# EAGLE board ptn5 (EAGLE 5.06)
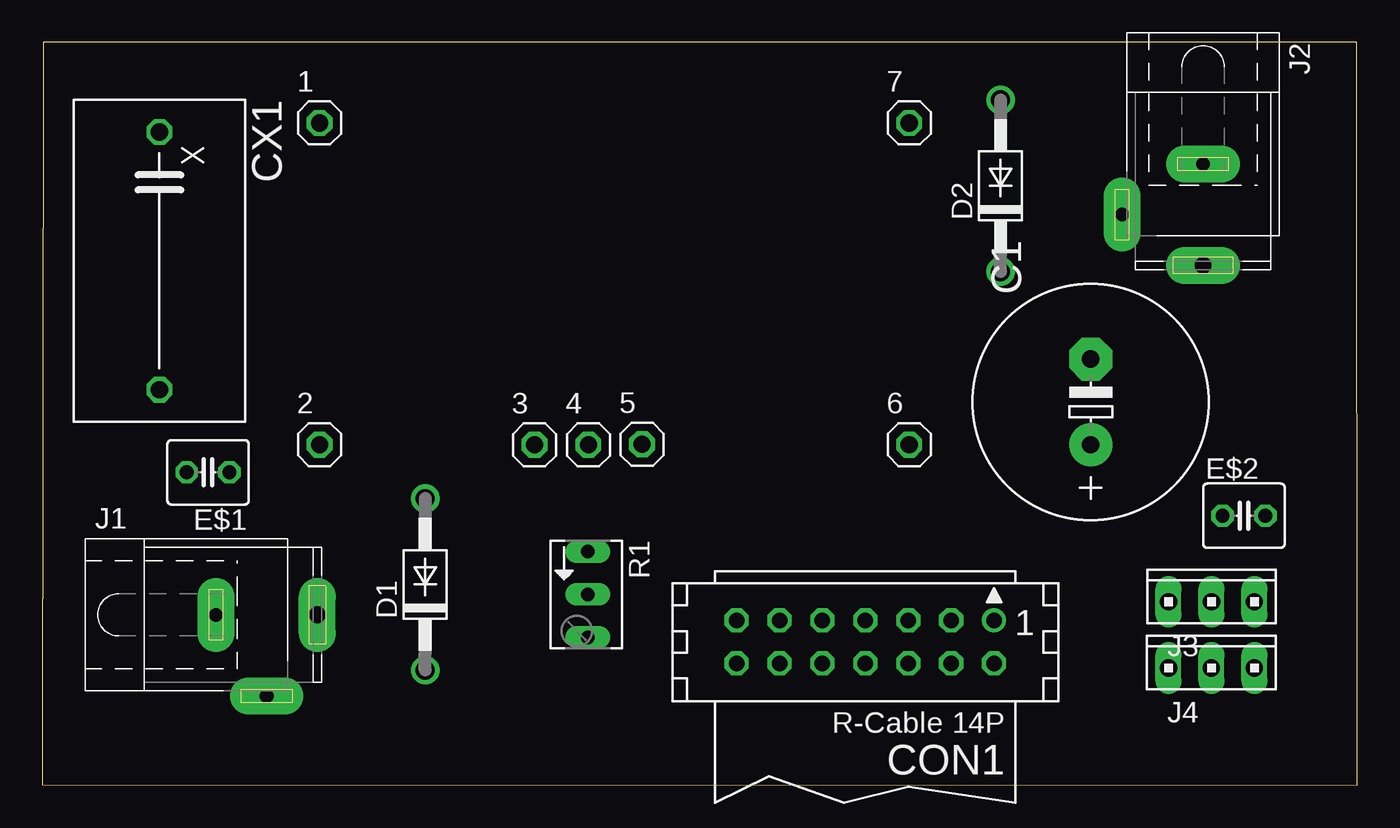
[diagram p0: board, top side]
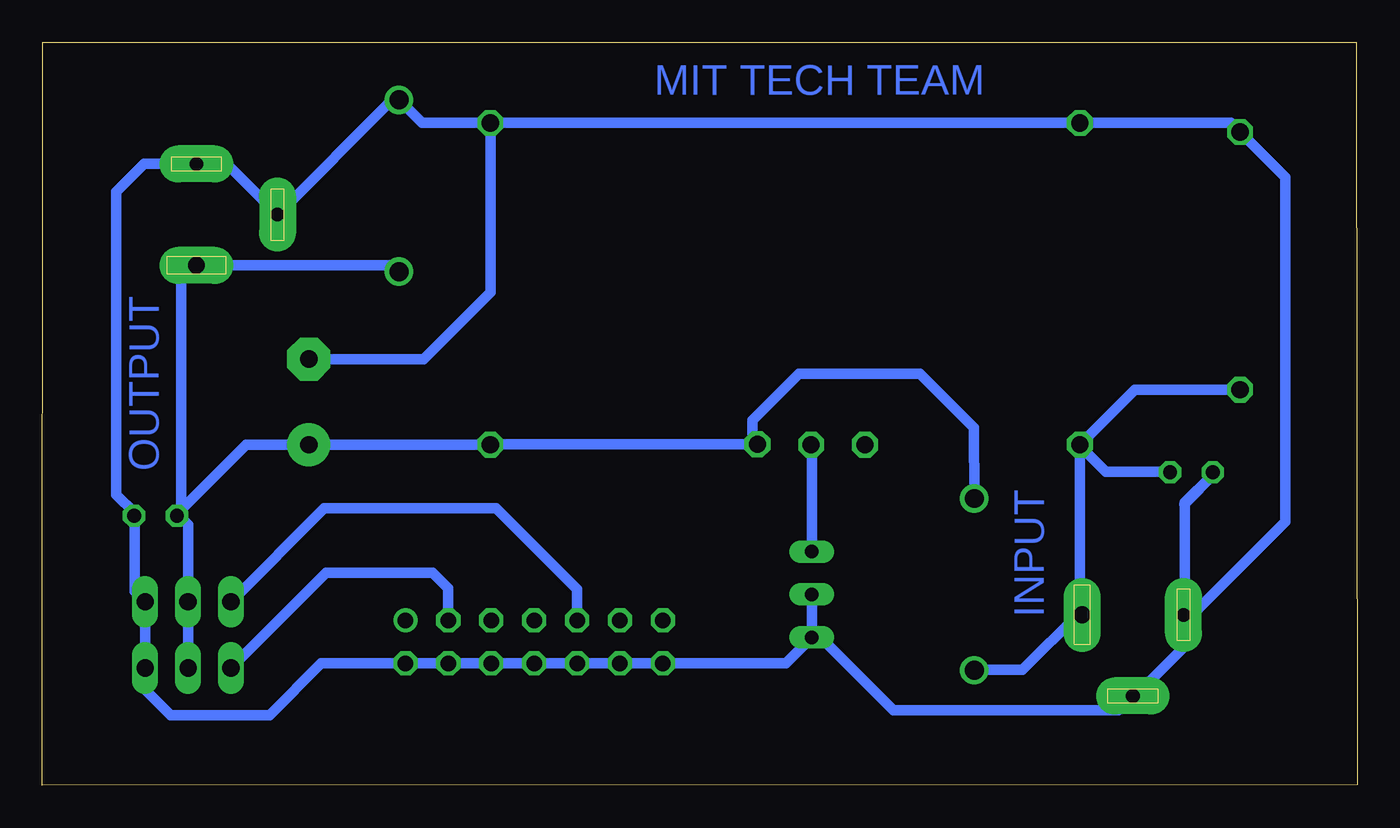
[diagram p1: board, bottom side, seen from below]

Size 77.82 x 43.96 mm. Coordinates in mm from the lower left corner, seen from the top.
Outline: 0,0.03 77.82,0 77.81,43.96 0.05,43.96 0,0.03
Copper layers (1*16): Top 0.035mm / dielectric 1.5mm / Bottom 0.035mm
Design rules "default": minimum track width 10mil, minimum drill 24mil, track to track 8mil, track to pad 8mil, pad to pad 8mil, via to via 8mil, smd to smd 8mil, copper to edge 40mil, drill to drill 8mil, minimum pad ring 10mil, minimum via ring 8mil, stop-mask expansion 4mil, vias tented up to drill 0mil, thermal gap 10mil

## Footprints (pad centres in the part's own frame; a part is rotated, then mirrored left to right if it is on the bottom)
1X01 = drill 1.016 octagon: 1 0,0
E5-13 = drill 1.016 pad 2.54 round: + -2.54,0 | drill 1.016 pad 2.54 octagon: - 2.54,0
CON14 = drill 0.914 round: 1 -7.62,-1.27 | drill 0.914 octagon: 2 -7.62,1.27; 3 -5.08,-1.27; 4 -5.08,1.27; 5 -2.54,-1.27; 6 -2.54,1.27; 7 0,-1.27; 8 0,1.27; 9 2.54,-1.27; 10 2.54,1.27; 11 5.08,-1.27; 12 5.08,1.27; 13 7.62,-1.27; 14 7.62,1.27
XC15B10 = drill 1.016 octagon: 1 -7.62,0; 2 7.62,0
DO41-10 = drill 1.118 round: A 5.08,0; C -5.08,0
C025-040X050 = drill 0.813 octagon: 1 -1.27,0; 2 1.27,0
SPC4078 = drill 0.8 pad 2.184 long: 1 -3,0; 2 0,-4.8 | drill 1 pad 2.184 long: 3 3,0
10X03MTA = drill 1.016 long: 1 2.54,0; 2 0,0; 3 -2.54,0
B64Y = drill 0.813 long: A 2.54,0; E -2.54,0; S 0,0

## Placement (x,y rotation side)
1  [1X01]  16.41,39.19 0 top
2  [1X01]  16.41,20.16 0 top
3  [1X01]  29.13,20.15 0 top
4  [1X01]  32.32,20.15 0 top
5  [1X01]  35.5,20.18 0 top
6  [1X01]  51.31,20.16 0 top
7  [1X01]  51.31,39.19 0 top
C1  [E5-13]  62.05,22.68 90 top
CON1  [CON14]  48.71,8.49 180 top
CX1  [XC15B10]  6.93,31.03 270 top
D1  1N4004  [DO41-10]  22.67,11.89 90 top
D2  1N4004  [DO41-10]  56.72,35.48 90 top
E$1  [C025-040X050]  9.81,18.52 180 top
E$2  [C025-040X050]  71.12,15.96 0 top
J1  [SPC4078]  13.28,10.09 0 top
J2  [SPC4078]  68.7,33.76 270 top
J3  [10X03MTA]  69.2,10.86 0 top
J4  [10X03MTA]  69.2,6.95 0 top
R1  [B64Y]  32.28,11.3 270 top

## Library data of the parts
1-7 = pinhead
C1 CX1 E$1 E$2 = rcl
CON1 = con-harting
D1 D2 = diode
J1 J2 = con-jack
J3 J4 = con-amp
R1 = pot

## Nets
N$1: 2.1 CX1.2 D1.C J1.3
N$2: CON1.3 J4.3
N$3: CON1.9 J3.3
N$5: 4.1 R1.E
N$7: 1.1 7.1 C1.- CON1.2 CON1.4 CON1.6 CON1.8 CON1.10 CON1.12 CON1.14 CX1.1 D2.A J1.1 J1.2 J2.1 J2.2 J3.1 J4.1 R1.A R1.S
N$8: 5.1 6.1 C1.+ D1.A D2.C J2.3 J3.2 J4.2

## Tracks (layer width: path | path; a pad name or v marks a point on that pad's centre or on a via)
N$1
  Bottom 0.61: CX1.2 13.16,23.41 2.1 16.41,10.22 | J1.3 16.41,10.22 | 16.41,10.22 16.42,10.22 19.81,6.83 22.65,6.83 D1.C
N$2
  Bottom 0.61: CON1.3 53.79,11.67 54.71,12.59 61.01,12.59 J4.3
N$3
  Bottom 0.61: CON1.9 46.17,11.61 50.96,16.39 61.13,16.39 J3.3
N$5
  Bottom 0.61: R1.E 32.28,20.11 4.1
N$7
  Bottom 0.61: 8.68,18.27 10.19,16.76 10.19,10.18 J1.1 | J1.1 9.77,10.09 4.26,15.6 4.26,35.98 CX1.1 7.47,39.19 1.1 | J1.1 10.19,10 10.19,8.24 13.15,5.29 J1.2 14.13,4.45 27.45,4.45 31.76,8.76 R1.A | R1.A R1.S | C1.- 55.24,25.22 51.28,29.18 51.28,39.16 7.1 55.35,39.19 D2.A 57.11,40.56 J2.2 66.9,36.76 J2.1 71.8,36.76 73.44,35.12 73.44,17.2 72.36,16.12 72.36,11.49 J3.1 J4.1 71.73,5.67 70.21,4.16 64.38,4.16 61.31,7.22 CON1.2 CON1.4 CON1.6 CON1.8 CON1.10 CON1.12 CON1.14 33.81,7.22 R1.A
N$8
  Bottom 0.61: D1.A 22.69,21.16 25.88,24.35 33.03,24.35 35.78,21.6 35.78,20.46 5.1 51.29,20.18 6.1 62.03,20.16 C1.+ 65.76,20.14 69.61,16.3 | J4.2 J3.2 69.2,15.41 69.85,16.06 69.61,16.3 | 69.61,16.3 69.61,29.85 J2.3 57.08,30.76 D2.C
S$9
  Bottom 0.61: 8.39,18.48 10.24,16.63
S$13
  Bottom 0.61: 11.14,18.55 14.87,18.55 16.45,20.13
S$17
  Bottom 0.61: 16.36,39.2 51.36,39.2 51.36,39.12

## Text on the board
Bottom: TEAM | MIT TECH | OUTPUT | INPUT